# Altium PCB PCB1.PcbDoc
Units mm, origin at the board's own origin, x right, y up, seen from the top; angles counter-clockwise.
Board outline 39.5 x 32 mm, 4 copper layers (L1(Signal), L2(GND), L3(GND), L4(Signal)), stack 1.57 mm thick; 35 components, 29 nets, 170 pads, 61 vias.
Unrouted connection lines stored in the file: 21.
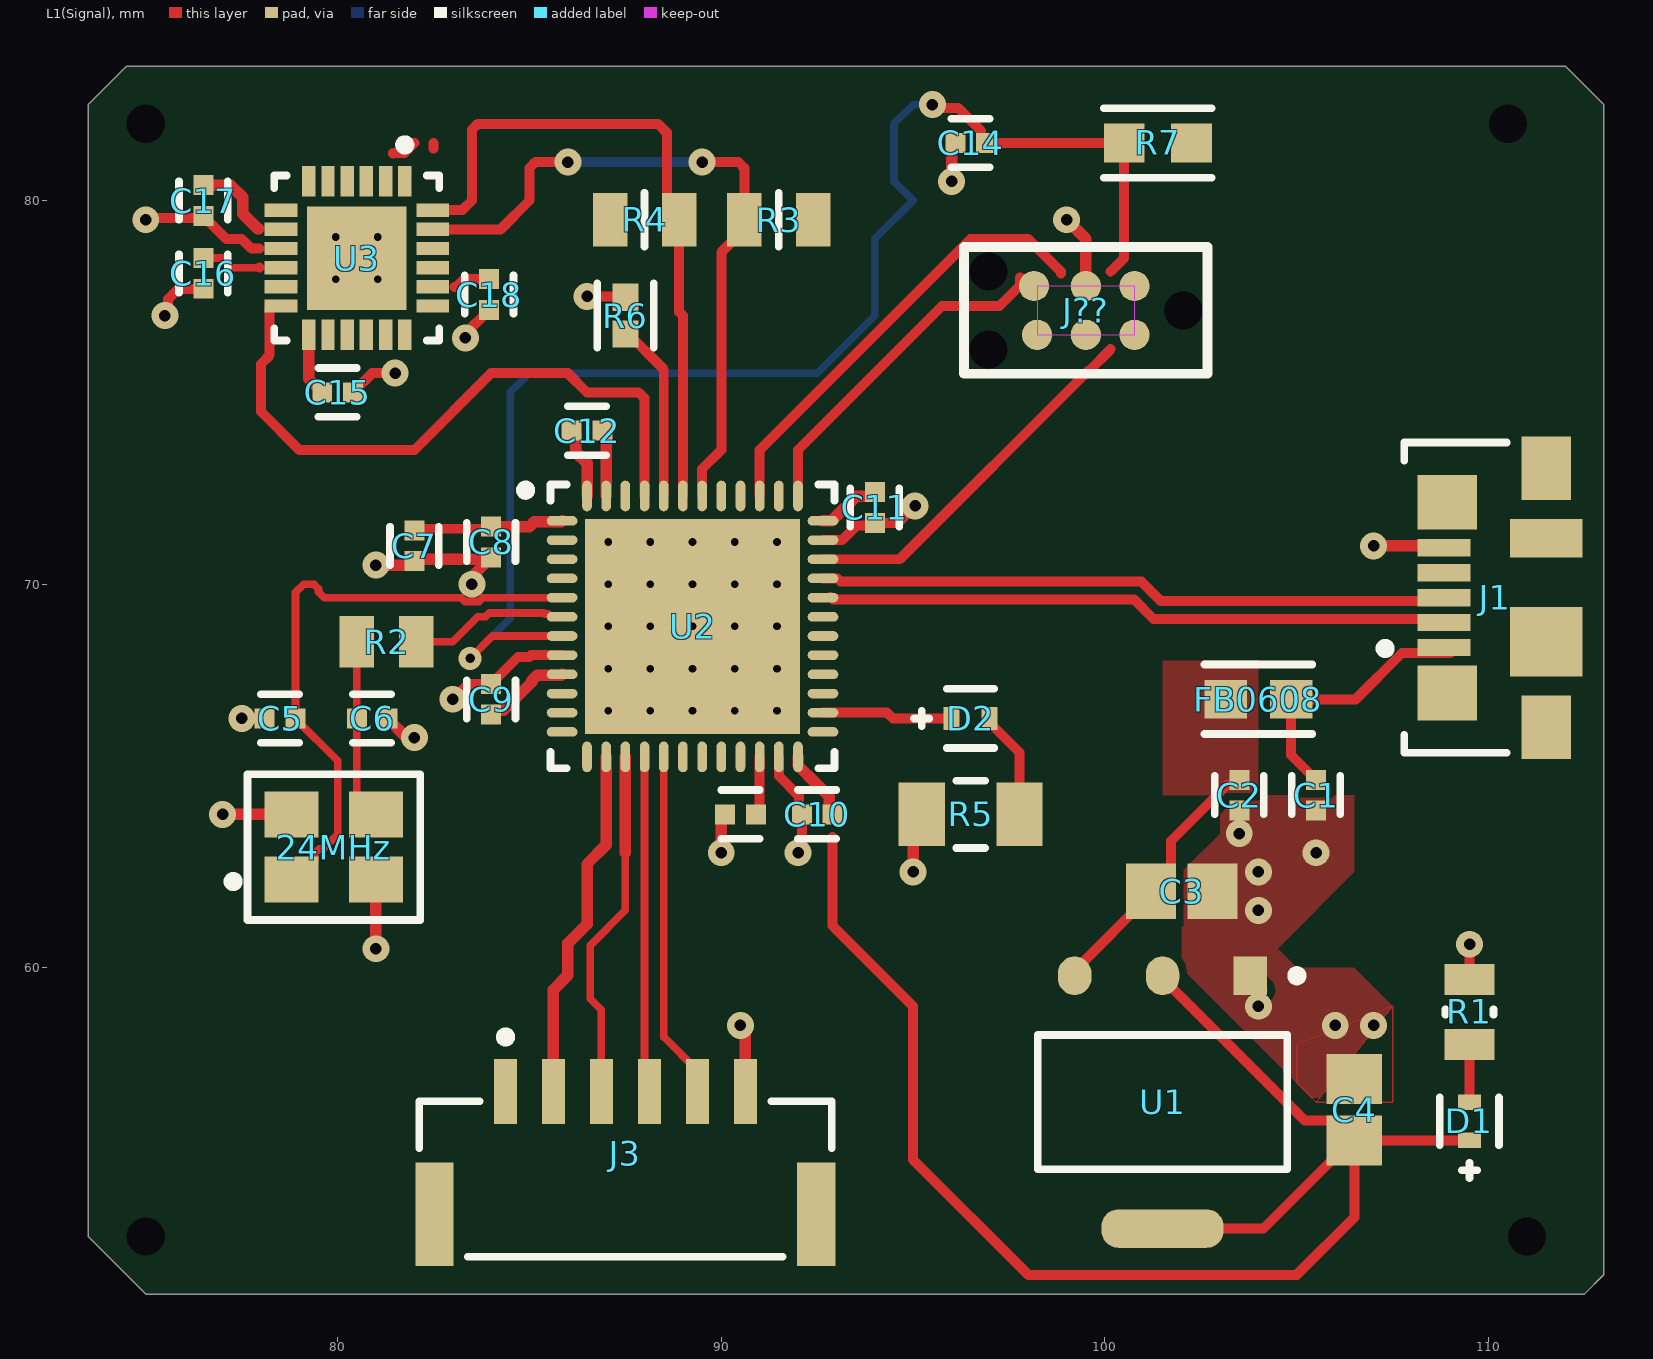
[diagram p0: L1(Signal) view]
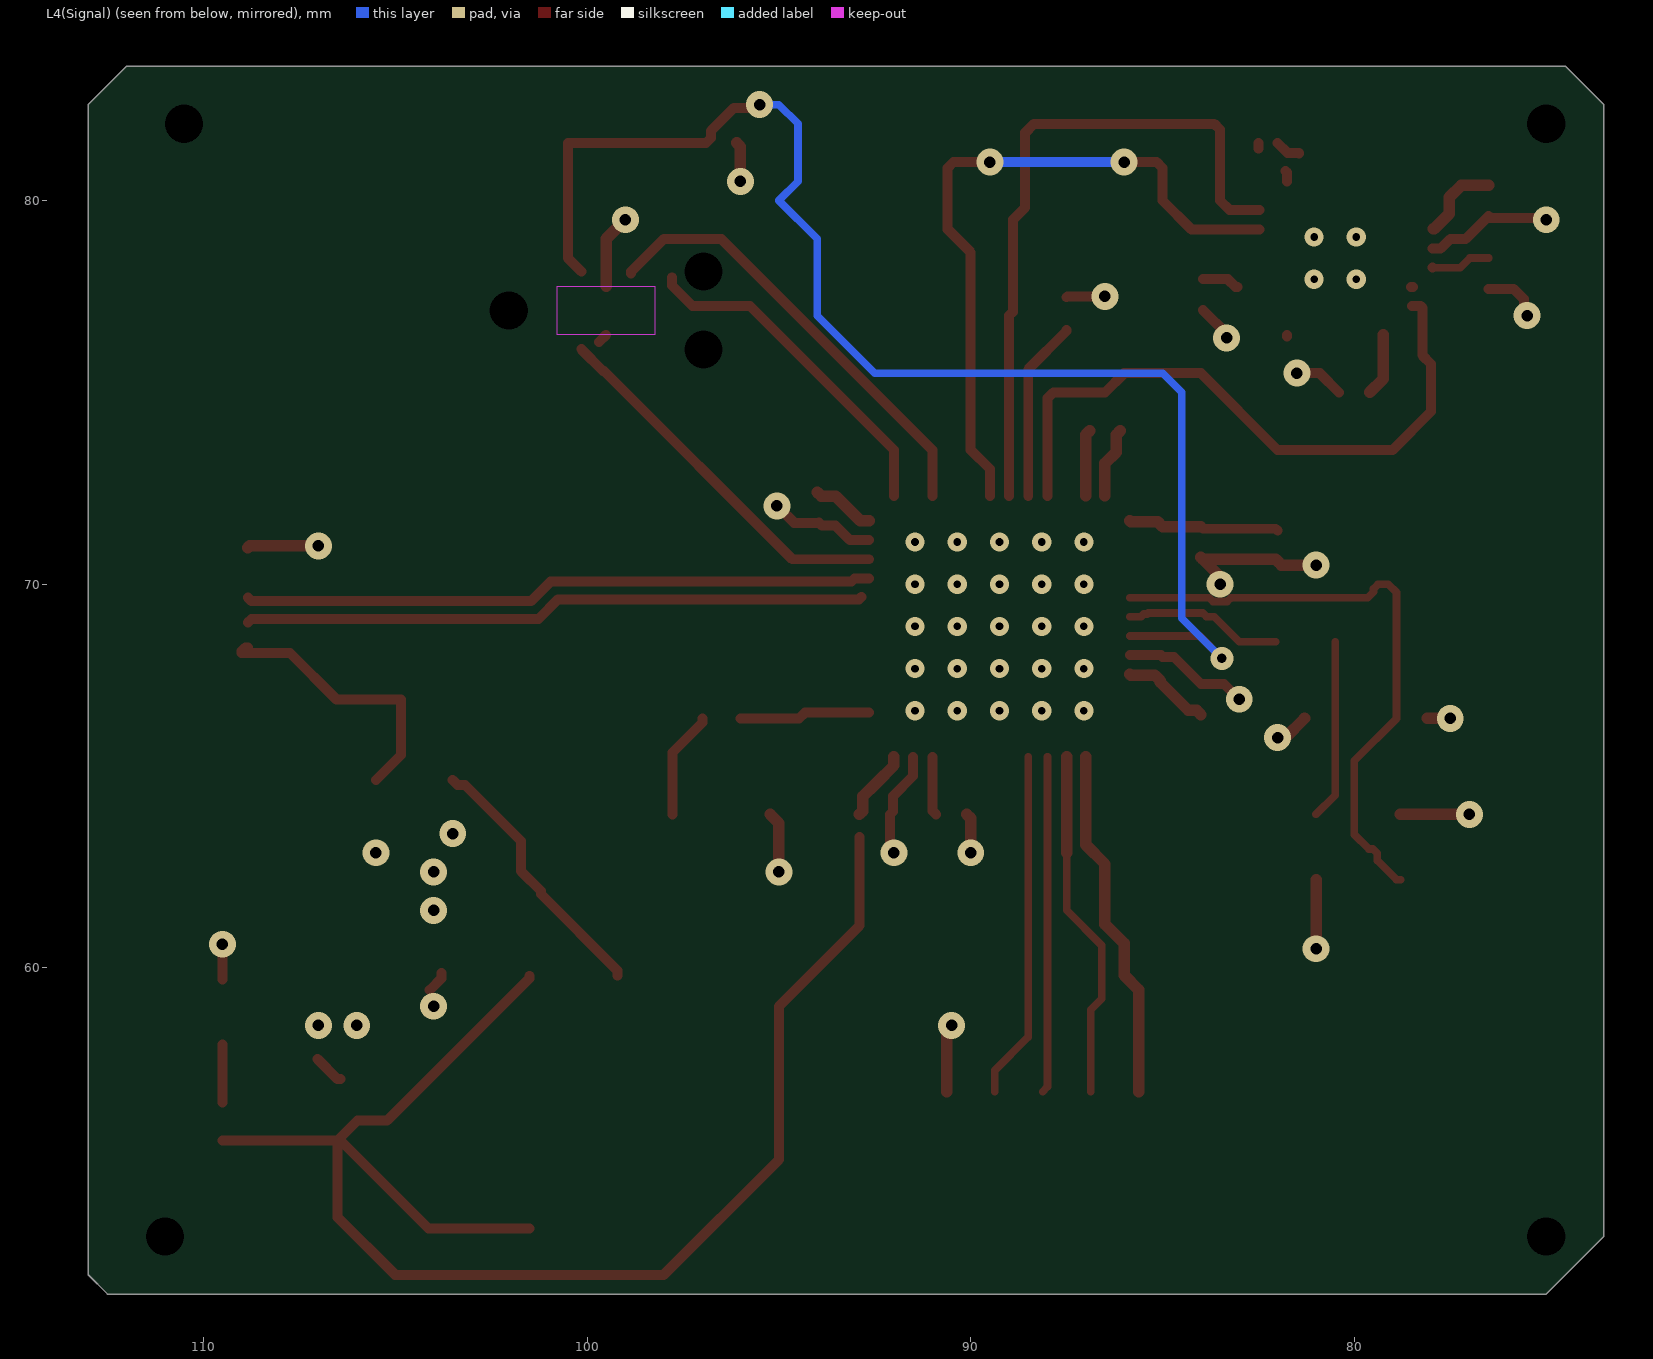
[diagram p1: L4(Signal) view, seen from below]
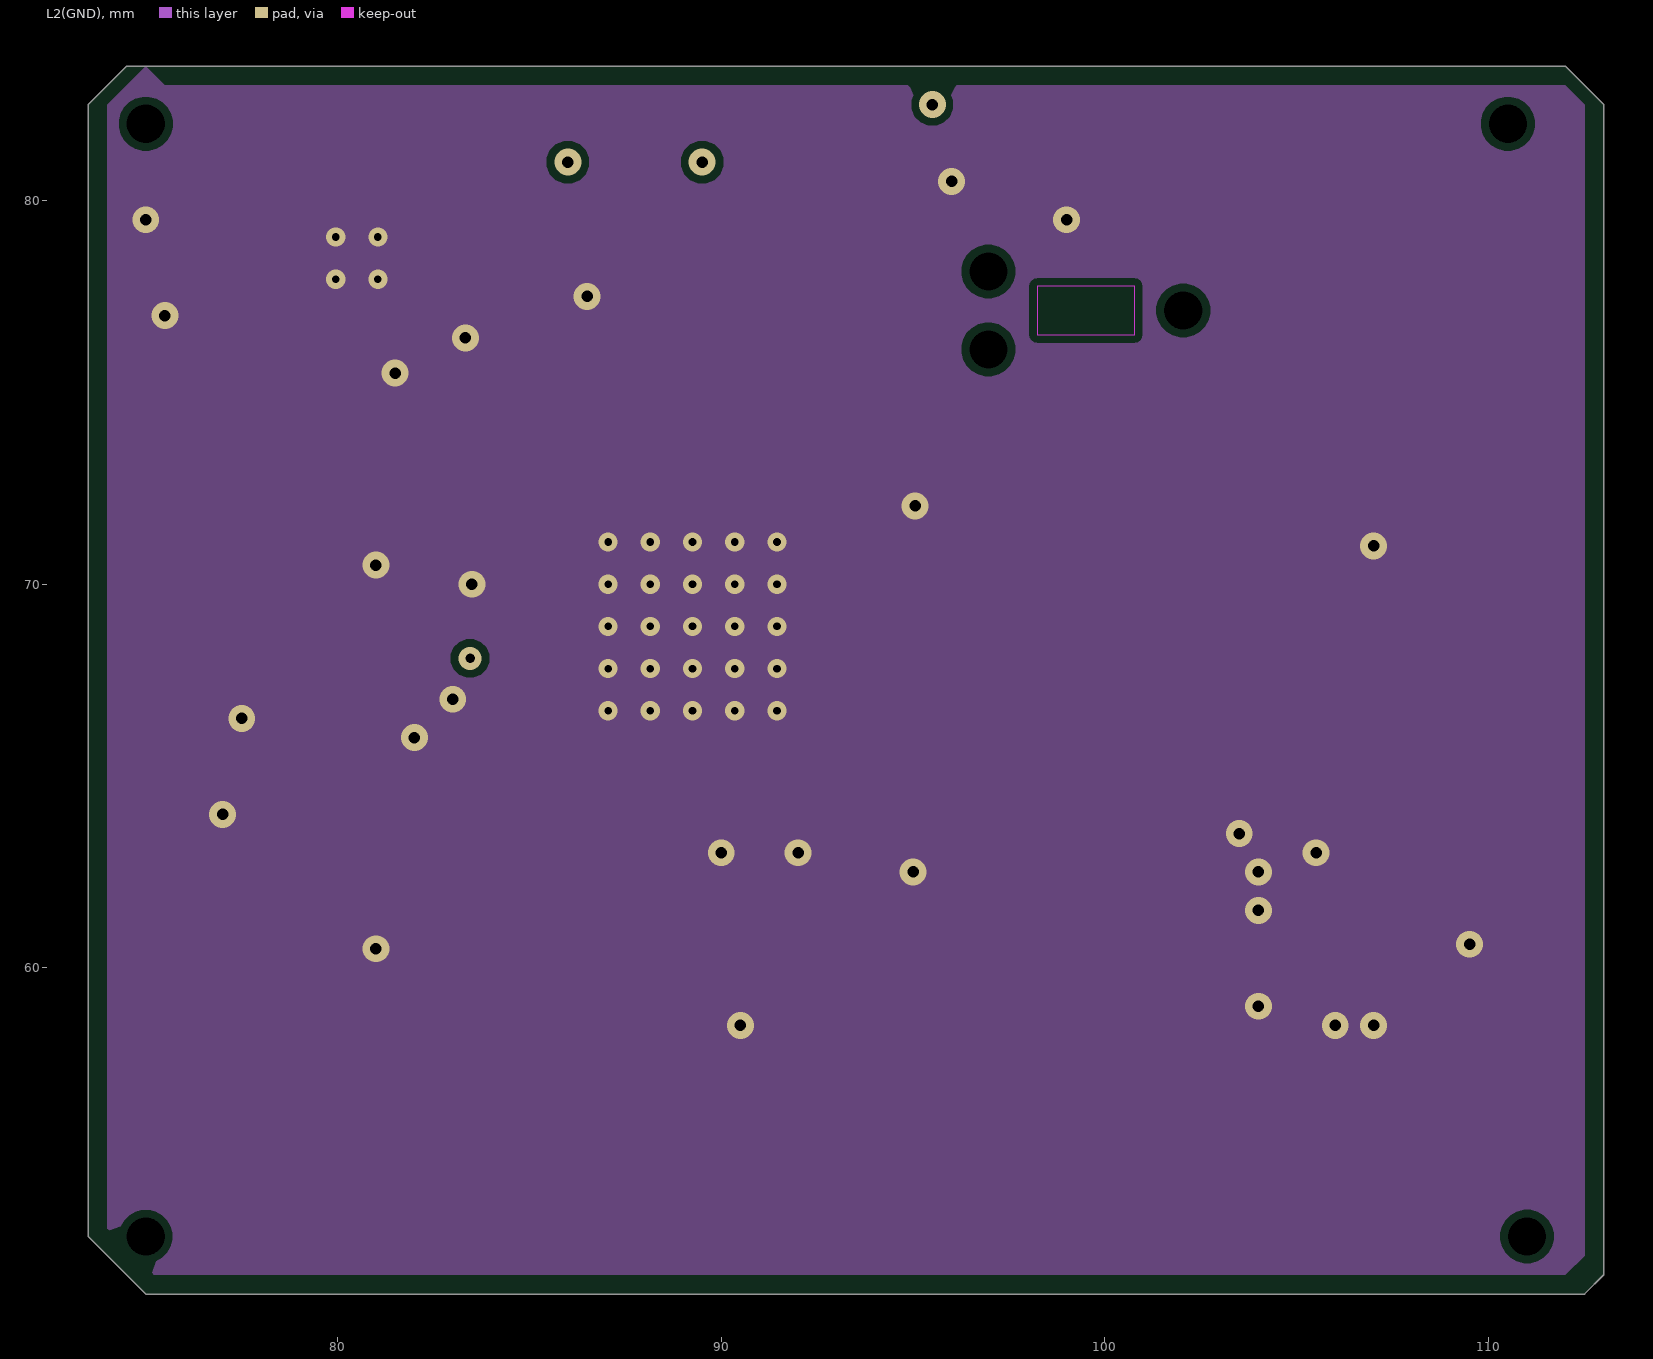
[diagram p2: L2(GND)]
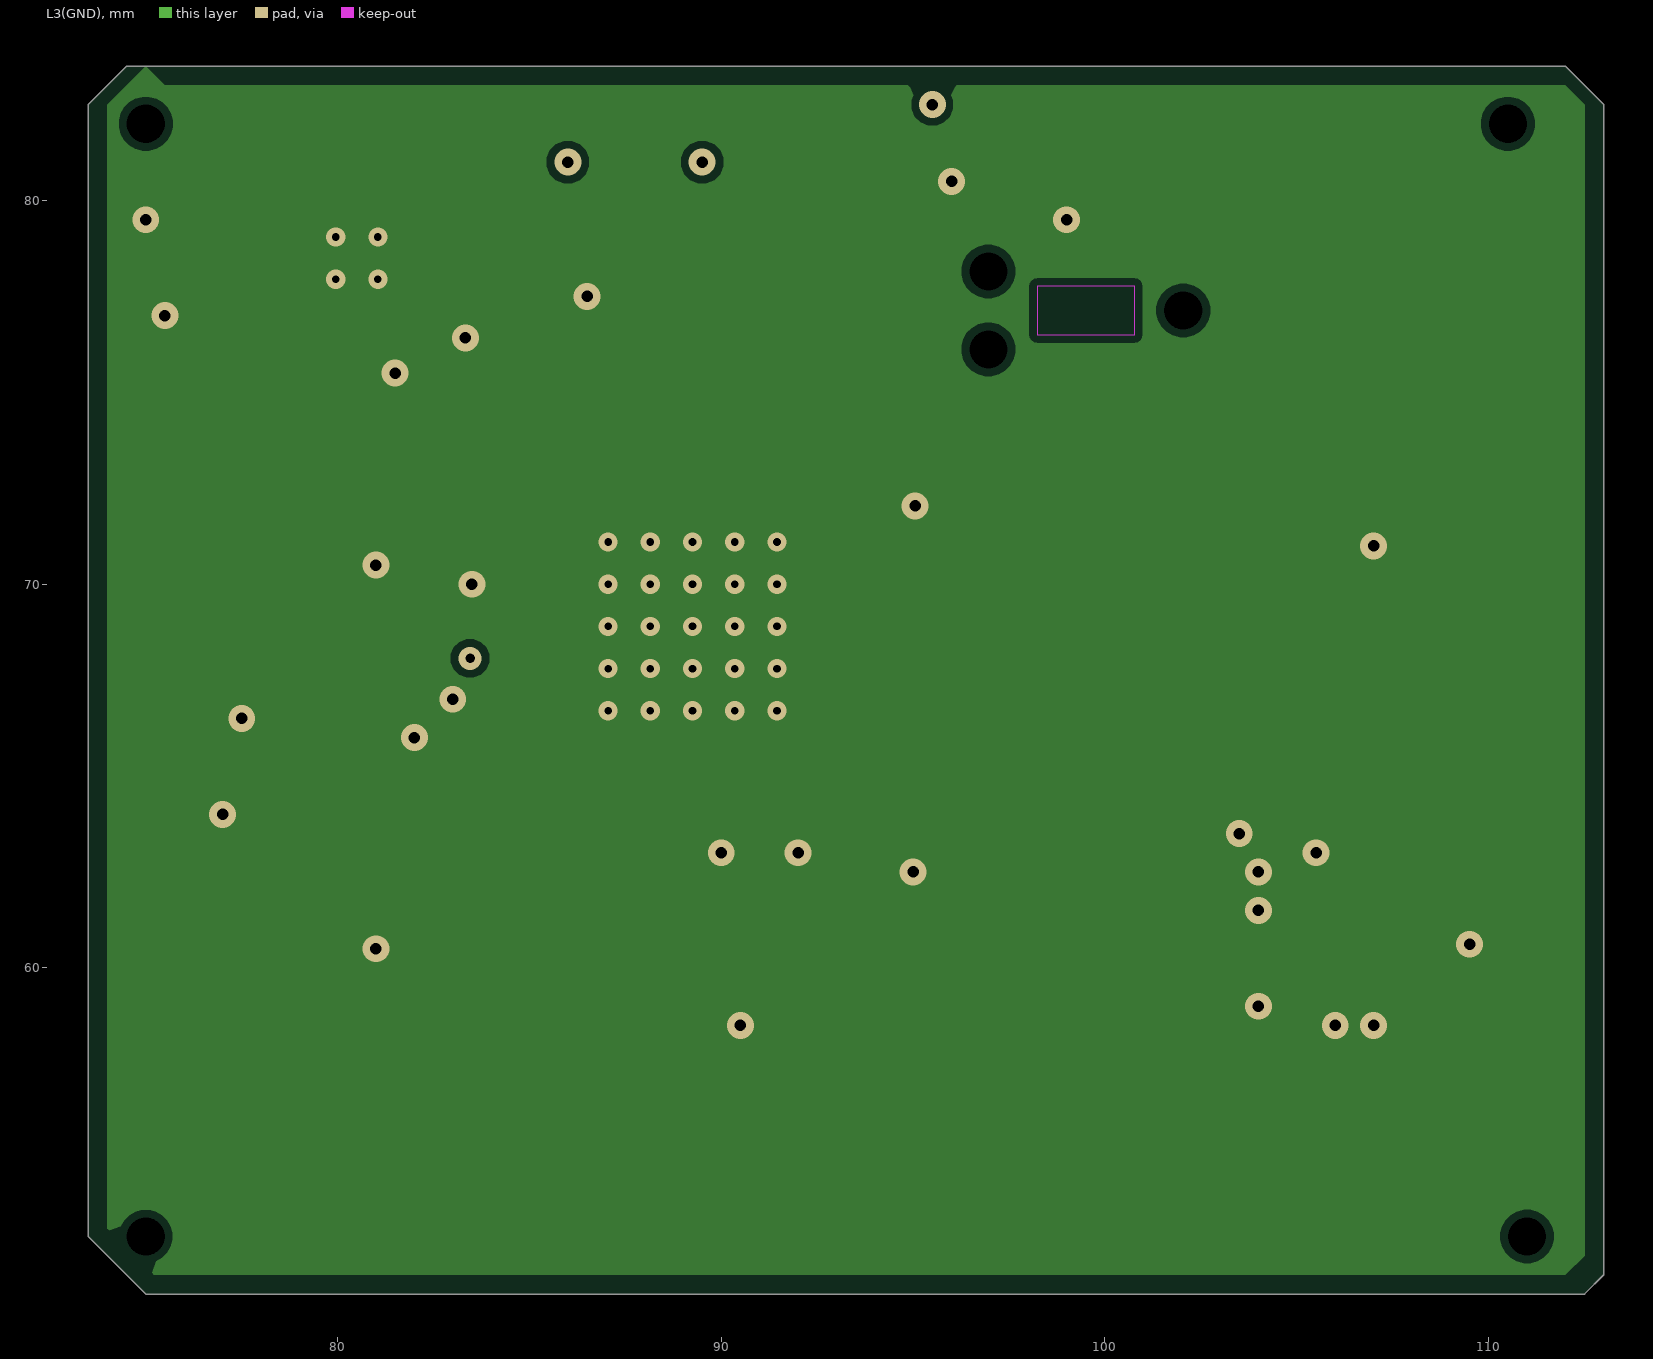
[diagram p3: L3(GND)]
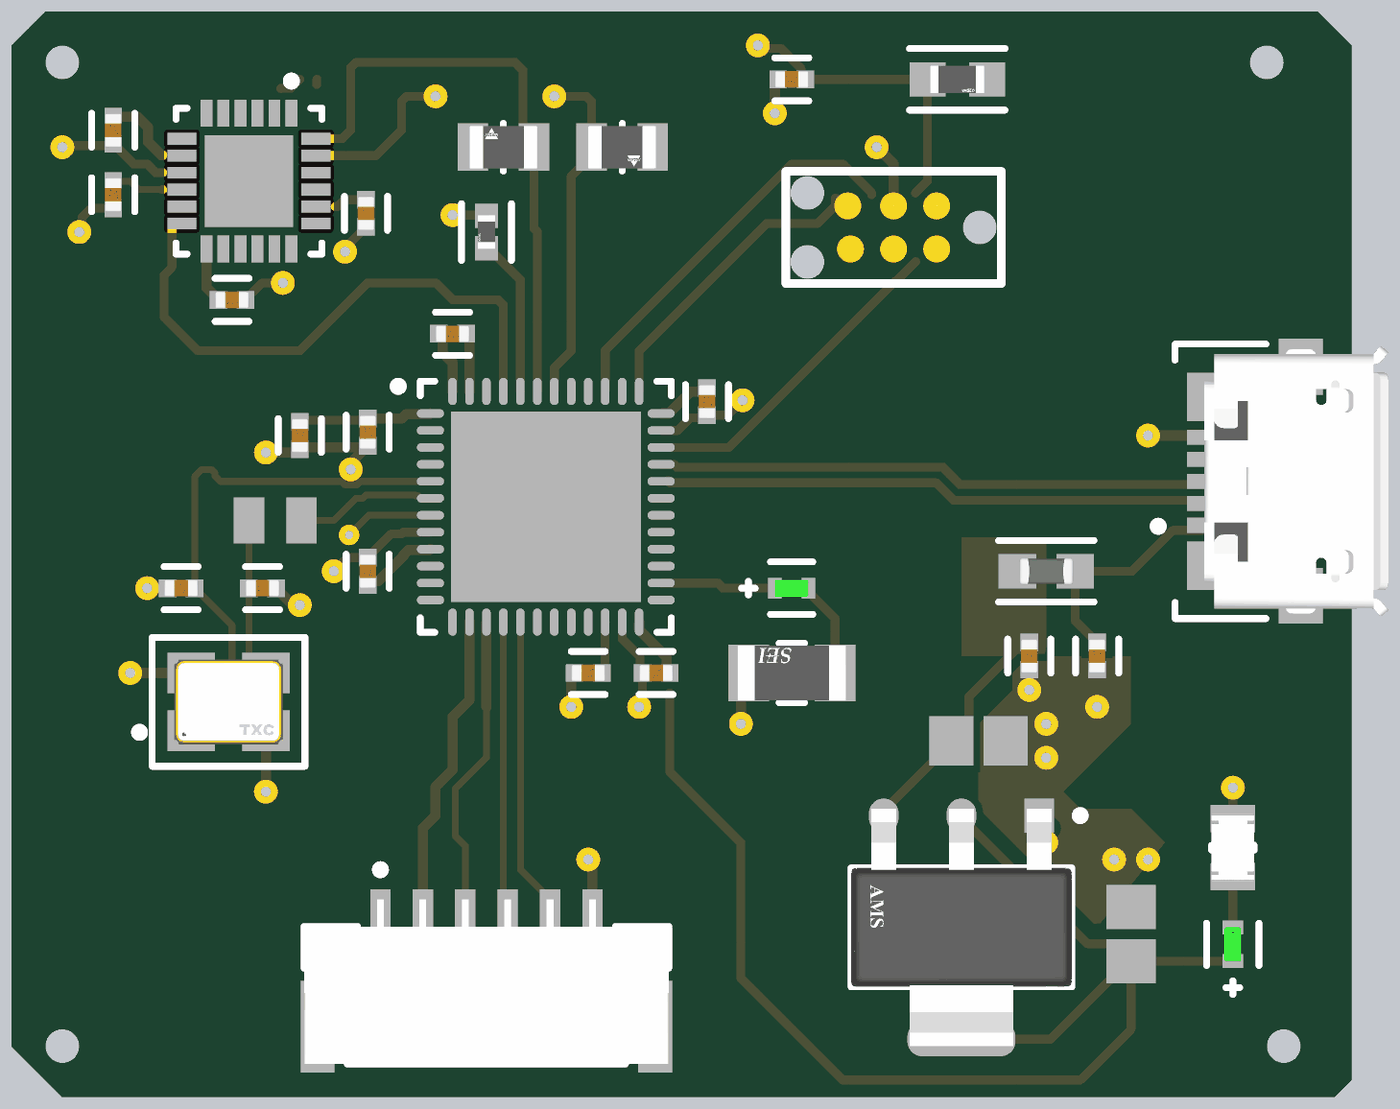
[diagram p4: 3D render of the assembled board from above, using the file's embedded part models]

## Layer stack, top to bottom
Top Solder: solder mask 0.0254, SM-001, Dk 4
L1(Signal): signal copper 0.035
Dielectric 1: prepreg 0.2, PP-017, Dk 4.6
L2(GND): signal copper 0.0175
Dielectric 3: core 1.065, Core-039, Dk 4.6
L3(GND): signal copper 0.0175
Dielectric 5: prepreg 0.2, PP-017, Dk 4.6
L4(Signal): signal copper 0.035
Bottom Solder: solder mask 0.0254, SM-001, Dk 4

## Board outline
73.5,53 73.5,82.5 74.5,83.5 112,83.5 113,82.5 113,52 112.5,51.5 75,51.5

## Design rules (kind name [scope] priority, off if disabled: settings)
Clearance [All] p1: gap=0.2 ignorepadtopadclearanceinfootprint=FALSE
DiffPairsRouting [All] p1: maxlimit=0.254 minlimit=0.203 mostfreqgap=0.254 toplayer_maxgap=0.203 toplayer_prefgap=0.203 toplayer_minwidth=0.26 toplayer_maxwidth=0.26 toplayer_prefwidth=0.26 bottomlayer_maxgap=0.203 bottomlayer_prefgap=0.203 bottomlayer_minwidth=0.26 bottomlayer_maxwidth=0.26 bottomlayer_prefwidth=0.26 impedanceprofiledriven=TRUE impedanceprofileid={04D04388-7D09-4078-8D84-CEB31DD55E11} impedanceprofilevalue=90.000000 maxuncoupledlength=12.7
PolygonConnect [All] p1: connectstyle=Direct reliefconductorwidth=0.254 reliefentries=4 polygonreliefangle="90 Angle" airgapwidth=0.254
RoutingVias [All] p1: holewidth=0.3 width=0.7 viastyle="Through Hole" minholewidth=0.25 minwidth=0.55 maxholewidth=0.4 maxwidth=0.9
SolderMaskExpansion [All] p1: expansion=0 istentingtop=FALSE
SupplyNets "Schematic Supply Nets_4" [InNet('3V3')] p1: voltage=0.000
SupplyNets "Schematic Supply Nets_3" [InNet('GND')] p2: voltage=0.000
SupplyNets "Schematic Supply Nets_2" [InNet('+5V')] p3: voltage=0.000
SupplyNets "Schematic Supply Nets_1" [InNet('+3V3')] p4: voltage=0.000
SupplyNets "Schematic Supply Nets" [InNet('VBUS')] p5: voltage=0.000
UnRoutedNet [All] p1: checkbadconnections=TRUE
Width [All] p1: maxlimit=1 minlimit=0.2 preferedwidth=0.3 midlayer1_minwidth=0.254 midlayer1_maxwidth=0.254 midlayer1_prefwidth=0.254 midlayer2_minwidth=0.254 midlayer2_maxwidth=0.254 midlayer2_prefwidth=0.254 minimp=50.000000 maximp=50.000000 favimp=50.000000
28 further rules are at their usual default settings.

## Classes and differential pairs
differential pair class DIFF_USB: USB_D
differential pair USB_D: +USB_D_P -USB_D_N

## Components (designator, comment, footprint, x,y, rotation, side; value= is the part's Value field where it differs from the comment)
24MHz "7M-24.000MEEQ-T" FP-7M-MFG 79.9,63.15 r0 top
C1 "2.2 uF" FP-C0402-BB-MFG 105.5,64.5 r90 top
C2 "2.2 uF" FP-C0402-BB-MFG 103.5,64.5 r90 top
C3 "22u" CAPC2013X140X50NL20T25 102,62 r180 top
C4 "2u2" CAPC2013X140X50NL20T25 106.5,56.3 r270 top
C5 "100 nF" FP-C0402-BB-MFG 78.5,66.5 r0 top
C6 "100 nF" FP-C0402-BB-MFG 80.9,66.5 r180 top
C7 "2.2 uF" FP-C0402-BB-MFG 82,71 r90 top
C8 "100 nF" FP-C0402-BB-MFG 84,71.1 r90 top
C9 "100 nF" FP-C0402-BB-MFG 84,67 r270 top
C10 "100 nF" FP-C0402-BB-MFG 92.5,64 r0 top
C11 "100 nF" FP-C0402-BB-MFG 94,72 r90 top
C12 "100 nF" FP-C0402-BB-MFG 86.5,74 r180 top
C14 "100 nF" FP-C0402-BB-MFG 96.5,81.5 r0 top
C15 "100 nF" FP-C0402-BB-MFG 80,75 r180 top
C16 "100 nF" FP-C0402-BB-MFG 76.5,78.1 r90 top
C17 "10nF" FP-C0402-BB-MFG 76.5,80 r90 top value="100 nF"
C18 "2n2" FP-C0402-BB-MFG 83.95,77.55 r90 top value="100 nF"
D1 "SM0402GC" FP-SM0402GC-MFG 109.5,56 r90 top
D2 "SM0402GC" FP-SM0402GC-MFG 96.495,66.5 r0 top
FB0608 "FBMH1608HM101-TV" FP-FBMH1608-IPC_A 104,67 r180 top
J1 "473460001" FP-473460001-MFG 111.15,69.65 r90 top
J3 "SM06B-GHS-TB(LF)(SN)" FP-SM06B-GHS-TB_LF_SN-MFG 87.5,54.5 r0 top
J?? "TC2030-MCP-NL" TC2030-IDC-NL 102.04,77.135 r180 top
R1 "CRCW0805330RJNEA" FP-CRCW0805-e3-IPC_C 109.5,58.851 r90 top
R2 "CRG0805ZR" RESC2013X65X40LL15T20 81.275,68.5 r0 top
R3 "MCU08050D2201BP500" FP-MCU0805-MFG 91.5,79.5 r0 top
R4 "MCU08050D2201BP500" FP-MCU0805-MFG 88,79.5 r180 top
R5 "RMCF1206FG1K00" FP-RMCF1206-IPC_C 96.5,64 r180 top
R6 "AC0402DR-0710K7L" FP-AC0402-IPC_A 87.5,77 r270 top
R7 "AC0603JR-7W10KL" FP-AC0603-IPC_A 101.377,81.5 r0 top
U1 "ams1117" FP-ams1117-IPC_C 101.5,56.5 r270 top
U2 "STM32F411CEU6" STM-UFQFPN48_L 89.25,68.9 r0 top
U3 "MPU-6050" IS-QFN-24_V 80.5,78.5 r270 top
? "C13" FP-C0402-BB-MFG 90.5,64 r0 top value="2.2 uF"

## Footprints (in the part's own frame and the unit in brackets; to place one, negate y for a bottom-side part, rotate by r counter-clockwise, add the part's x,y. Pads: shape width x height; smd on the part's side, far side on the other; paste and mask are expansions set on the pad)
CAPC2013X140X50NL20T25 [mm] "Chip Capacitor, 2-Leads, Body 2.00x1.25mm, IPC Medium Density"
  rect 1.3x1.45 smd: 1(-0.8,0) 2(0.8,0)
  body extent -1.1,-0.72 1.1,0.72, height 1.4
FP-7M-MFG [mm]
  rect 1.4x1.2 smd paste+0 mask+0: 1(-1.1,-0.85) 2(1.1,-0.85) 3(1.1,0.85) 4(-1.1,0.85)
  silkscreen extent -2.75,-1.9 2.25,1.9, body extent -1.9,-1.55 1.9,1.55, height 0.25
FP-473460001-MFG [mm]
  rect 0.45x1.38 smd paste+0 mask+0: 1(-1.3,2.31) 2(-0.65,2.31) 3(0,2.31) 4(0.65,2.31) 5(1.3,2.31)
  rect 1.425x1.55 smd paste+0 mask+0: 6(-2.488,2.225) 7(2.488,2.225)
  rect 1.65x1.3 smd paste+0 mask+0: 8(-3.375,-0.35) 11(3.375,-0.35)
  rect 1.8x1.9 smd paste+0 mask+0: 9(-1.15,-0.35)
  rect 1x1.9 smd paste+0 mask+0: 10(1.55,-0.35)
  silkscreen extent -4.05,0.67 4.05,3.97, body extent -4.3,-2.48 4.3,3.45, height 0.25
FP-AC0402-IPC_A [mm]
  rect 0.715x0.672 smd paste+0 mask+0: 1(-0.479,0) 2(0.479,0)
  silkscreen extent -0.84,-0.74 0.84,0.74, body extent -1.04,-0.54 1.04,0.54, height 0.25
FP-AC0603-IPC_A [mm]
  rect 1.059x1.012 smd paste+0 mask+0: 1(-0.877,0) 2(0.877,0)
  silkscreen extent -1.41,-0.91 1.41,0.91, body extent -1.91,-1.01 1.91,1.01, height 0.25
FP-ams1117-IPC_C [mm]
  rect 1.004x0.872 smd paste+0 mask+0: 1(-3.295,2.29)
  rrect100% 1.004x0.872 smd paste+0 mask+0: 2(-3.295,0) 3(-3.295,-2.29)
  rrect87% 1.004x3.182 smd paste+0 mask+0: 4(3.295,0)
  silkscreen extent -3.42,-3.25 1.75,3.63, body extent -3.9,-3.35 3.9,3.35, height 0.25
FP-C0402-BB-MFG [mm]
  rect 0.52x0.52 smd paste+0 mask+0: 1(-0.4,0) 2(0.4,0)
  silkscreen extent -0.5,-0.64 0.5,0.64, body extent -0.8,-0.4 0.8,0.4, height 0.25
FP-CRCW0805-e3-IPC_C [mil]
  rect 31.75x51.5 smd paste+0 mask+0: 1(-33.5,0) 2(33.5,0)
  silkscreen extent -3,-25 3,25, body extent -53,-31 53,31, height 10
FP-FBMH1608-IPC_A [mm]
  rect 1.109x1.012 smd paste+0 mask+0: 1(-0.852,0) 2(0.852,0)
  silkscreen extent -1.41,-0.91 1.41,0.91, body extent -1.91,-1.01 1.91,1.01, height 0.25
FP-MCU0805-MFG [mm]
  rect 0.9x1.4 smd paste+0 mask+0: 1(-0.9,0) 2(0.9,0)
  silkscreen extent 0,-0.7 0,0.7, body extent -1.45,-0.8 1.45,0.8, height 0.25
FP-RMCF1206-IPC_C [mm]
  rect 1.204x1.658 smd paste+0 mask+0: 1(-1.276,0) 2(1.276,0)
  silkscreen extent -0.37,-0.87 0.37,0.87, body extent -1.98,-0.97 1.98,0.97, height 0.25
FP-SM06B-GHS-TB_LF_SN-MFG [mm]
  rect 0.6x1.7 smd paste+0 mask+0: 1(-3.125,2.275) 2(-1.875,2.275) 3(-0.625,2.275) 4(0.625,2.275) 5(1.875,2.275) 6(3.125,2.275)
  rect 1x2.7 smd paste+0 mask+0: 7(-4.975,-0.925) 8(4.975,-0.925)
  silkscreen extent -5.38,-2.02 5.38,3.82, body extent -5.58,-2.37 5.58,3.22, height 0.25
FP-SM0402GC-MFG [mil]
  rect 16x24 smd paste+0 mask+0: 1(-19.5,0) 2(19.5,0)
  silkscreen extent -58,-30 25,31, body extent -31,-18 31,18, height 10
IS-QFN-24_V [mm] "QFN, 24-Leads, Body 4x4mm, Pitch 0.5mm, Thermal Pad 2.7x2.6mm"
  rect 0.8x0.35 smd: 1(-2,1.25) 2(-2,0.75) 3(-2,0.25) 4(-2,-0.25) 5(-2,-0.75) 6(-2,-1.25) 13(2,-1.25) 14(2,-0.75) 15(2,-0.25) 16(2,0.25) 17(2,0.75) 18(2,1.25)
  rect 0.35x0.85 smd mask+0.102: 7(-1.25,-1.975) 8(-0.75,-1.975) 9(-0.25,-1.975) 10(0.25,-1.975) 11(0.75,-1.975) 12(1.25,-1.975) 19(1.25,1.975) 20(0.75,1.975) 21(0.25,1.975) 22(-0.25,1.975) 23(-0.75,1.975) 24(-1.25,1.975)
  rect 2.7x2.6 smd: 25(0,0)
  silkscreen extent -3.07,-2.15 2.15,2.15, body extent -2,-2 2,2, height 0.95
RESC2013X65X40LL15T20 [mm] "Chip Resistor, 2-Leads, Body 2.00x1.30mm, IPC High Density"
  rect 0.9x1.35 smd: 1(-0.775,0) 2(0.775,0)
  body extent -1.07,-0.72 1.07,0.72, height 0.65
STM-UFQFPN48_L [mm] "QFN, 48-Leads, Body 7.1x7.1mm, Pitch 0.5mm, Thermal Pad 5.6x5.6mm, IPC High Density"
  oval 0.8x0.25 smd: 1(-3.4,2.75) 2(-3.4,2.25) 3(-3.4,1.75) 4(-3.4,1.25) 5(-3.4,0.75) 6(-3.4,0.25) 7(-3.4,-0.25) 8(-3.4,-0.75) 9(-3.4,-1.25) 10(-3.4,-1.75) 11(-3.4,-2.25) 12(-3.4,-2.75) 25(3.4,-2.75) 26(3.4,-2.25) 27(3.4,-1.75) 28(3.4,-1.25) 29(3.4,-0.75) 30(3.4,-0.25) 31(3.4,0.25) 32(3.4,0.75) 33(3.4,1.25) 34(3.4,1.75) 35(3.4,2.25) 36(3.4,2.75)
  oval 0.25x0.8 smd: 13(-2.75,-3.4) 14(-2.25,-3.4) 15(-1.75,-3.4) 16(-1.25,-3.4) 17(-0.75,-3.4) 18(-0.25,-3.4) 19(0.25,-3.4) 20(0.75,-3.4) 21(1.25,-3.4) 22(1.75,-3.4) 23(2.25,-3.4) 24(2.75,-3.4) 37(2.75,3.4) 38(2.25,3.4) 39(1.75,3.4) 40(1.25,3.4) 41(0.75,3.4) 42(0.25,3.4) 43(-0.25,3.4) 44(-0.75,3.4) 45(-1.25,3.4) 46(-1.75,3.4) 47(-2.25,3.4) 48(-2.75,3.4)
  rect 5.6x5.6 smd: 49(0,0)
  silkscreen extent -4.47,-3.7 3.7,3.7, body extent -3.55,-3.55 3.55,3.55, height 0.6
TC2030-IDC-NL [mm] "Tag-Connect 6-Pin with No Legs (PN# TC2030-IDC-NL)"
  round 0.9 hole 0.995 unplated: 0(0,0) 0(5.08,-1.016) 0(5.08,1.016)
  round 0.79 smd paste-0.39: 1(1.27,-0.635) 2(1.27,0.635) 3(2.54,-0.635) 4(2.54,0.635) 5(3.89,-0.635) 6(3.81,0.635)
  Keep-Out Layer region: 1.27,-0.635 3.81,-0.635 3.81,0.635 1.27,0.635
  silkscreen extent -0.64,-1.65 5.71,1.65

## Part data
24MHz: library part CMP-18717-000318-1, "Crystal 24MHz, 10ppm, 10pF, 50Ω", Case/Package=SMD/SMT, ESR (Equivalent Series Resistance)=60R, Frequency=24MHz, Frequency Stability=10ppm, Load Capacitance=10pF, Max Operating Temperature=70°C, Min Operating Temperature=-20°C, Package Quantity=3000, Depth=2.5mm, Frequency Tolerance=10ppm, Height=0.031inch, Lead Free="Lead Free", Length=3.2mm, Mount="Surface Mount", Number of Pins=4, Packaging="Tape and Reel", REACH SVHC="No SVHC", Series=7M, Termination=SMD/SMT, Tolerance=10ppm, Width=0.098inch
C1 C2 C5 C6 C7 C8 C9 C10 C11 C12 C14 C15 C16: library part CMP-1034-01425-3, "Capacitor, Ceramic, 330Pf, 16Vdc, 10-% Tol, 10+% Tol, X7r-Tc Code, -15, 15%-Tc Rohs Compliant: Yes", Manufacturer=Kemet, Manufacturer Part Number=C0402C331K4RACTU, Package=C0402-BB, Temperature="-55°C to +125°C", Temperature Characteristic=X7R, Temperature Coefficient=15%, Temperature Range High=+125°C, Temperature Range Low=-55°C, Tolerance=0.1, Voltage Rating="16 V", Automotive=No, Category=Cap, ComponentLink2Description=Datasheet, ComponentLink2URL=https://content.kemet.com/datasheets/KEM_C1002_X7R_SMD.pdf, Device Class L1="Passive Components", Device Class L2=Capacitors, Device Class L3="Ceramic Capacitors", Digikey Description="Capacitor, Ceramic, 330Pf, 16Vdc, 10-% Tol, 10+% Tol, X7r-Tc Code, -15, 15%-Tc Rohs Compliant: Yes", Height=0.55mm, Ipc Land Pattern Name=CAPC10050X50, Lead Free=Yes, Material=Ceramic, Mouser Description="Multilayer Ceramic Capacitors MLCC - SMD/SMT 16volts 330pF X7R 10%", Octopart=https://octopart.com/c0402c331k4ractu-kemet-9139363, RoHS=TRUE
  C1 C2 C7: Capacitance="2.2 uF"
  C5 C6 C8 C9 C10 C11 C12 C14 C15 C16: Capacitance="100 nF"
C3 C4: library part CMP-2007-03253-1, Manufacturer=Kemet, Part Number=C0805C185K4RACTU
C17 C18: library part CMP-1034-01425-3, "Capacitor, Ceramic, 330Pf, 16Vdc, 10-% Tol, 10+% Tol, X7r-Tc Code, -15, 15%-Tc Rohs Compliant: Yes", Capacitance="100 nF", Manufacturer=Kemet, Manufacturer Part Number=C0402C331K4RACTU, Package=C0402-BB, Temperature="-55°C to +125°C", Temperature Characteristic=X7R, Temperature Coefficient=15%, Temperature Range High=+125°C, Temperature Range Low=-55°C, Tolerance=0.1, Voltage Rating="16 V", Automotive=No, Category=Cap, ComponentLink2Description=Datasheet, ComponentLink2URL=https://content.kemet.com/datasheets/KEM_C1002_X7R_SMD.pdf, Device Class L1="Passive Components", Device Class L2=Capacitors, Device Class L3="Ceramic Capacitors", Digikey Description="Capacitor, Ceramic, 330Pf, 16Vdc, 10-% Tol, 10+% Tol, X7r-Tc Code, -15, 15%-Tc Rohs Compliant: Yes", Height=0.55mm, Ipc Land Pattern Name=CAPC10050X50, Lead Free=Yes, Material=Ceramic, Mouser Description="Multilayer Ceramic Capacitors MLCC - SMD/SMT 16volts 330pF X7R 10%", Octopart=https://octopart.com/c0402c331k4ractu-kemet-9139363, RoHS=TRUE
D1 D2: library part CMP-35283-000001-2, "LED GREEN CLEAR 0402 SMD", Case Code (Imperial)=0402, Case Code (Metric)=1005, Color=Green, Forward Voltage=1.9V, Lens Color=Colorless, Test Current=20mA, Case/Package=0402, Dominant Wavelength=572nm, Height=0.71mm, Length=1mm, Lens Size=1mm, Lens Style=Flat, Lens Transparency=Clear, Luminous Intensity=28.5mcd, Mount="Surface Mount", Packaging="Tape and Reel", Viewing Angle=130°, Width=0.5mm
FB0608: library part CMP-14488-000006-2, "None", Case Code (Imperial)=0603, Case Code (Metric)=1608, DC Resistance (DCR)=35mR, Max Current Rating=2.5A, Max DC Current=2A, Max Operating Temperature=125°C, Min Operating Temperature=-40°C, Package Quantity=4000, Ratings=AEC-Q200, Test Frequency=100MHz, Tolerance=25%, Case/Package=0603, Core Material=Ferrite, Height=0.8mm, Impedance=100R, Length=0.063inch, Mount="Surface Mount", Number of Lines=1, Packaging="Tape and Reel", RoHS Compliant=Yes, Termination=SMD/SMT, Weight=7.1E-05oz, Width=0.031inch
J1: library part CMP-2000-05246-2, "CONN RCPT USB2.0 MICRO B SMD R/A", Current Rating=1.8A, Manufacturer=Molex, Package=0, Temperature="-30°C to +85°C", Temperature Range High=+85°C, Temperature Range Low=-30°C, Voltage Rating=30V, Automotive=No, Category=Conn, ComponentLink2Description=Datasheet, ComponentLink2URL=https://www.molex.com/webdocs/datasheets/pdf/en-us/0473460001_IO_CONNECTORS.pdf, Conn Orientation="Right Angle", Contact Material=Gold,Nickel, Device Class L1=Connectors, Device Class L2="USB Connectors", Device Class L3=unset, Digikey Description="CONN RCPT USB2.0 MICRO B SMD R/A", Footprint Url=https://www.molex.com/pdm_docs/sd/473460001_sd.pdf, Height=2.945mm, Is Female=yes, Lead Free=Yes, Manufacturer Part Number=473460001, Number Of Contacts=5, Octopart=https://octopart.com/47346-0001-molex-7164928, Pitch=0.65mm, RoHS=TRUE, Shielding=true, Usb Standard="USB 2.0"
J3: library part CMP-17439-000061-1, "CONN HEADER SMD R/A 6POS 1.25MM", Color=Natural, Contact Resistance=50mR, Current Rating=1A, Housing Color=Beige, Max Operating Temperature=85°C, Max Voltage Rating (AC)=50V, Min Operating Temperature=-25°C, Connector Type="Outer Shroud Contact", Contact Material=Bronze, Contact Plating=Tin, Depth=4.05mm, Fastening Type=Ramp, Housing Material=Polyamide, Lead Free="Lead Free", Length=10.75mm, Max Current Rating=1A, Mount="Surface Mount", Number Of Contacts=6, Number of Positions=6, Number of Rows=1, Orientation="Right Angle", Packaging="Tape and Reel", Pitch=1.25mm, Termination=Solder, Voltage Rating=50V
J??: library part CMP-205963-000002-1, "CABLE TAG-CONNECT IN-CIRCUIT", Package Quantity=1, Lead Free="Lead Free", Reach SVHC Compliant=Yes, RoHS Compliant=Yes, Series=-
R1: library part CMP-2001-03824-2, "RES Thick Film, 330Ω, 5%, 0.125W, 200ppm/°C, 0805", Case Code (Imperial)=0805, Case Code (Metric)=2012, Max Operating Temperature=155°C, Max Power Dissipation=125mW, Min Operating Temperature=-55°C, Package Quantity=1, Resistance=330R, Temperature Coefficient=200ppm/°C, Tolerance=5%, Voltage Rating=150V, Case/Package=0805, Composition="Thick Film", Contact Plating=Tin, Depth=1.25mm, Features="Automotive AEC-Q200", Height=0.02inch, Lead Free="Lead Free", Length=2mm, Military Standard=Not, Number of Terminations=2, Packaging="Tape and Reel", Power Rating=125mW, Radiation Hardening=No, Termination=SMD/SMT, Voltage Rating (DC)=150V, Weight=0.000194oz, Width=0.049inch
R2: library part CMP-2000-07514-1, "Chip Resistor, 0 Ohm, 0.125 W, -55 to 125 degC, 0805 (2012 Metric), RoHS, Tape and Reel", Case Code (Imperial)=0805, Case Code (Metric)=2012, Manufacturer="TE Connectivity", Max Operating Temperature=125degC, Min Operating Temperature=-55degC, Number of Resistors=1, Package Description="2-Pin Surface Mount Device, Body 2 x 1.25 mm", Package Quantity=5000, Package Reference=RESC2013X65X40L15T20, Power Rating=125mW, Resistance=0mOhm, Tolerance=0%, Voltage Rating=150V, Case\/Package=0805, Composition=ThickFilm, Datasheet URL=www.te.com/commerce/DocumentDelivery/DDEController?Action=showdoc&DocId=Customer+Drawing%7F1623401%7FBA%7Fpdf%7FEnglish%7FENG_CD_1623401_BA.pdf%7F1623401-1, Datasheet Version="Rev. BA, 12/2009", Depth=1.25mm, ELV=Compliant, Height=0.55mm, Length=2mm, Manufacturer URL=http://www.te.com/, Mount=SurfaceMount, Mounting Technology=SurfaceMount, Number of Terminations=2, Packaging=TapeandReel, Radiation Hardening=No, RoHSCompliant=true, Termination=Solder, Weight=0.000194oz, Width=1.25mm
R3 R4: library part CMP-02407-001865-1, "RES 1.05K OHM 0.5% 1/5W 0805", Case/Package=0805, Max Operating Temperature=125°C, Max Power Dissipation=125mW, Min Operating Temperature=-55°C, Package Quantity=5000, Resistance=2.2kR, Temperature Coefficient=25ppm/°C, Tolerance=0.1%, Composition="Thin Film", Depth=1.25mm, Height=0.022inch, Lead Free="Lead Free", Length=0.079inch, Military Standard=Not, Number of Terminations=2, Packaging="Tape and Reel", Width=0.049inch
R5: library part CMP-26527-005571-1, "1kΩ ±1% 0.25W 1206 Thick Film Chip Resistor AEC-Q200 compliant", Case/Package=1206, Max Operating Temperature=155°C, Max Power Dissipation=250mW, Min Operating Temperature=-55°C, Package Quantity=10000, Resistance=1kR, Resistor Type="Thick Film", Temperature Coefficient=100ppm/°C, Tolerance=1%, Contact Plating=Tin, Features="Automotive AEC-Q200", Height=0.028inch, Length=0.126inch, Mount="Surface Mount", Number of Terminations=2, Packaging="Tape and Reel", Radiation Hardening=No, RoHS Compliant=Yes, Series=RMCF, Width=0.063inch
R6: library part CMP-03412-007717-2, "RES 10.7kΩ ±0.5% 0.063W 0402", RoHS Compliant=Yes
R7: library part CMP-03412-040683-1, "RES 10kΩ 5.00% 0.2W 0603"
U1: library part CMP-209535-000002-1, "1A LOW DROPOUT VOLTAGE REGULATOR", RoHS Compliant=Yes
U2: library part CMP-0243-00165-1, "ARM Cortex-M4 32-bit MCU+FPU, 512 KB Flash, 128 KB RAM, 36 I/Os, 48-Pin UFQFPN, -40 to 85 degC, Tray", I/Os (High Current)=36, Operating Frequency(F) (Processor speed) (MHz)=100, Package Description=UFQFPN48, Package Reference="48-Pin Ultra Thin Fine Pitch Quad Flat No-Lead, 7 x 7 x 0.6 mm Body, 0.5 mm Pitch, Exposed Pad", Supply Voltage(Vcc) min (V)=1.7, ComponentLink1Description="Manufacturer URL", ComponentLink1URL=http://www.st.com/, ComponentLink2Description=Datasheet, ComponentLink2URL=http://www.st.com/st-web-ui/static/active/en/resource/technical/document/datasheet/DM00115249.pdf, Core="ARM Cortex-M4", DatasheetVersion="Rev. 6", FLASH Size (Prog) (kB)=512, Internal RAM Size (kB)=128, Mounting Technology="Surface Mount", Packing=Tray
U3: library part CMP-1753-00002-2, "3-Axis Gyroscope, Accelerometer and a Digital Motion Processor(TM) (DMP), 2.375 to 3.46 V, -40 to 85 degC, 24-Pin QFN, RoHS, Tape and Reel", Manufacturer=InvenSense, Standard Package=5,000, Category=Sensors,Transducers, Datasheet URL=http://datasheet.octopart.com/MPU-6050-InvenSense-datasheet-14421344.pdf, Datasheet Version="Rev. 3.3, 05/2012", Dynamic Catalog=MPU-6000™Series, Family=Multifunction, Featured Product=MPU-60506-Axis,IntegratedI²CSolution, Manufacturer URL=http://www.invensense.com/, Online Catalog=MPU-6000™Series, Other Names="1428-1007-2 / MPU6050", Output Type=Digital, Sensor Type=MotionTracking, Unit PriceUSD=Digital
?: library part CMP-1034-01425-3, "Capacitor, Ceramic, 330Pf, 16Vdc, 10-% Tol, 10+% Tol, X7r-Tc Code, -15, 15%-Tc Rohs Compliant: Yes", Capacitance="2.2 uF", Manufacturer=Kemet, Manufacturer Part Number=C0402C331K4RACTU, Package=C0402-BB, Temperature="-55°C to +125°C", Temperature Characteristic=X7R, Temperature Coefficient=15%, Temperature Range High=+125°C, Temperature Range Low=-55°C, Tolerance=0.1, Voltage Rating="16 V", Automotive=No, Category=Cap, ComponentLink2Description=Datasheet, ComponentLink2URL=https://content.kemet.com/datasheets/KEM_C1002_X7R_SMD.pdf, Device Class L1="Passive Components", Device Class L2=Capacitors, Device Class L3="Ceramic Capacitors", Digikey Description="Capacitor, Ceramic, 330Pf, 16Vdc, 10-% Tol, 10+% Tol, X7r-Tc Code, -15, 15%-Tc Rohs Compliant: Yes", Height=0.55mm, Ipc Land Pattern Name=CAPC10050X50, Lead Free=Yes, Material=Ceramic, Mouser Description="Multilayer Ceramic Capacitors MLCC - SMD/SMT 16volts 330pF X7R 10%", Octopart=https://octopart.com/c0402c331k4ractu-kemet-9139363, RoHS=TRUE

## Free pads (board coordinates)
  round 0.9 hole 0.995 unplated: 1(75,53) 1(75,82) 1(110.5,82) 1(111,53)

## Via types
v1: diameter 0.7, hole 0.3, L1(Signal) to L4(Signal), 31 vias
v2: diameter 0.5, hole 0.2, L1(Signal) to L4(Signal), 29 vias
v3: diameter 0.6, hole 0.25, L1(Signal) to L4(Signal), 1 vias

## Nets (pads, with @x,y where several pads share a name; then routed paths per layer and width w, separated by ;. In a path a pad name is that pad's centre, name@x,y a point inside that pad or via, vN(x,y) a via of type N, cw(c..) or ccw(c..) an arc to the next point about the centre after c; other vN are vias at no path point)
3V3: C4.2 D1.1 U1.2 U1.4 | length 40.4
  L1(Signal) w0.26: 92.9,63.41 92.9,61.1 95,59 95,55 98,52 105,52 106.5,53.5 C4.2 ; U1.4 104.13,53.205 106.425,55.5 C4.2 ; U1.2 101.5,59.729 105.209,56.02 105.98,56.02 C4.2 ; D1.1 106.505,55.505 C4.2
+3V3: C7.2 C8.2 C9.2 C10.2 C11.2 C12.2 C15.2 C17.2 J3.1 J??.2 R3.2 R4.2 R7.2 U2.1 U2.9 U2.24 U2.36 U2.48 U3.8 U3.13 | length 15.5
  L1(Signal) w0.25: C7.2 82.05,71.45 83.95,71.45 C8.2
  L1(Signal) w0.3: C17.2 77.21,80.4 77.525,80.085 77.525,79.655 77.918,79.262 77.942,79.262 ; U3.13 79.25,75.35 C15.2 ; C9.2 84.11,66.71 84.325,66.71 85.056,67.441 85.056,67.482 85.199,67.625 85.825,67.625 U2.9 ; C8.2 85,71.5 85.125,71.625 85.825,71.625 U2.1 ; C12.2 86.21,73.89 86.21,73.44 86.5,73.15 U2.48 ; U2.24 92,65.275 92.449,64.826 92.631,64.644 92.636,64.644 92.811,64.468 92.811,64.089 C10.2 ; U2.36 92.875,71.65 93.515,72.29 93.89,72.29 C11.2
+5V: C2.2 C3.2 FB0608.2 U1.3 | length 7
  L1(Signal) w0.26: U1.3 99.21,59.935 101.2,61.925 C3.2 101.72,62.52 101.72,63.307 103.183,64.77 103.37,64.77 C2.2
GND: 24MHz.2 24MHz.4 ?.1 C1.1 C2.1 C3.1 C4.1 C5.1 C6.1 C7.1 C8.1 C9.1 C10.1 C11.1 C12.1 C14.1 C15.1 C16.1 C17.1 C18.1 J1.5 J3.6 J??.3 R1.2 R5.2 R6.1 U1.1 U2.8 U2.23 U2.35 U2.47 U2.49 U3.1 U3.9 U3.11 U3.18 U3.25 | length 39.6
  L1(Signal) w0.26: v1(75,79.5) 75.05,79.55 76.45,79.55 C17.1 77.1,79 77.5,79 77.75,78.75 77.958,78.75 ; v1(75.5,77) 75.584,77.084 75.584,77.434 75.85,77.7 C16.1 ; U3.11@78.478,77.75 U3.11 ; C15.1 80.9,75.5 v1(81.5,75.5) ; U3.18@81.75,76.453 U3.18 ; U3.1 81.75,80.725 U3.1@81.795,80.77 ; 82.5,81.349 82.5,81.5 ; v1(83,67) 83.4,67.4 C9.1 84.705,68.105 85,68.105 85.045,68.15 U2.8 ; v1@83.3,76.5 C18.1 ; v1(86.5,77.5) 87.479,77.5 R6.1 ; U2.23 91.5,65 92.024,64.476 92.024,64.076 C10.1 92.1,63.1 v1(92,63) ; U2.35 93.15,71.15 93.524,71.524 93.87,71.524 C11.1@93.955,71.609 ; C11.1 94.6,71.6 v1@95,72 ; U1.1@103.79,59.729 104.096,59.423 U1.1@104.102,59.423 ; U1.1 U1.1@103.79,59.861 ; C4.1@106.425,57.1 C4.1 C4.1@107.02,57.62 ; R1.2 v1@109.5,60.5
  L1(Signal) w0.3: v1(77,64) 24MHz.4 ; v1(77.5,66.5) C5.1 ; v1(81,60.5) 24MHz.2 ; v1(81,70.5) 81.9,70.5 C7.1 82.05,70.65 83.95,70.65 C8.1 83.5,70.2 v1(83.5,70) ; C6.1 81.8,66 v1(82,66) ; C12.1 87,73.9 U2.47 ; v1(90,63) 90,63.9 ?.1 ; v1(90.5,58.5) 90.625,58.375 J3.6 ; v1(95,62.5) 95,63.776 R5.2 ; v1(96,80.5) 96,81.4 C14.1 ; v1(99,79.5) 99.5,79 J??.3 ; v1(107,71) 108.79,71 J1.5
  other v1: 106,58.5 107,58.5 104,59 109.502,60.618 104,61.5 104,62.5 105.5,63 103.5,63.5 95.05,72.039 83.332,76.419
  other v2: 87.05,66.7 88.15,66.7 89.25,66.7 90.35,66.7 91.45,66.7 87.05,67.8 88.15,67.8 89.25,67.8 90.35,67.8 91.45,67.8 87.05,68.9 88.15,68.9 89.25,68.9 90.35,68.9 91.45,68.9 87.05,70 88.15,70 89.25,70 90.35,70 91.45,70 87.05,71.1 88.15,71.1 89.25,71.1 90.35,71.1 91.45,71.1 79.95,77.95 81.05,77.95 79.95,79.05 81.05,79.05
"IMU REGOUT": C16.2 U3.10 | length 1.6
  L1(Signal) w0.2: C16.2 76.992,78.5 77.242,78.25 77.958,78.25
IMU_CPOUT: C18.2 U3.20 | length 1
  L1(Signal) w0.26: 83.042,77.75 83.1,77.75 83.3,77.95 C18.2
IMU_INT: U2.45 U3.12 | length 17.1
  L1(Signal) w0.26: U3.12@78.5,77.245 78.27,77.245 78.23,77.205 78.23,75.967 78,75.737 78,74.5 79,73.5 82,73.5 84,75.5 86,75.5 86.5,75 87.848,75 88,74.848 U2.45
IMU_SCL: R3.1 U2.42 U3.23 | length 18.4
  L1(Signal) w0.26: U3.23 84.25,79.25 85,80 85,80.848 85.152,81 v1(86,81) ; U2.42 89.5,73 90,73.5 90,78.65 90.6,79.25 R3.1 90.6,80.848 90.448,81 v1(89.5,81)
  L4(Signal) w0.26: v1(86,81) v1(89.5,81)
IMU_SDA: R4.1 U2.43 U3.24 | length 17.9
  L1(Signal) w0.26: U3.24 83.25,79.75 83.5,80 83.5,81.848 83.652,82 88.348,82 88.58,81.768 88.58,79.82 R4.1 88.9,77.1 89,77 U2.43
LED_PWR_K: D1.2 R1.1 | length 1.5
  L1(Signal) w0.26: D1.2 R1.1
MCU_BOOT0: R6.2 U2.44 | length 4.7
  L1(Signal) w0.26: R6.2@87.5,76.623 87.5,76.6 88.5,75.6 U2.44
MCU_LED_A: D2.1 U2.26 | length 3.4
  L1(Signal) w0.26: U2.26 94.321,66.65 94.472,66.5 D2.1
MCU_NRST: C14.2 J??.1 R7.1 U2.7 | length 36.2
  L1(Signal) w0.2: v3(83.452,68.068) 84.033,68.65 U2.7
  L1(Signal) w0.26: v1(95.5,82.5) 95.584,82.416 96.171,82.416 96.77,81.817 96.77,81.63 C14.2 R7.1 100.5,78.5 100.148,78.148
  L4(Signal) w0.2: v3(83.452,68.068) 84.5,69.117 84.5,75 85,75.5 92.5,75.5 94,77 94,79 95,80 94.5,80.5 94.5,82 95,82.5 v1(95.5,82.5)
MCU_OSC_IN: 24MHz.1 C5.2 U2.5 | length 15.9
  L1(Signal) w0.2: 24MHz.1 78.9,62.3 79.4,62.8 79.4,62.983 79.517,63.1 79.624,63.1 80,63.476 80,65.4 C5.2 78.9,69.783 79.117,70 79.383,70 79.5,69.883 79.5,69.8 79.65,69.65 83.214,69.65 83.314,69.55 83.686,69.55 83.786,69.65 U2.5
MCU_PA4: J3.2 U2.14 | length 9.3
  L1(Signal) w0.3: J3.2 85.625,59.433 86,59.808 86,60.636 86.5,61.136 86.5,62.707 87,63.207 U2.14
MCU_PA5: J3.3 U2.15 | length 9.2
  L1(Signal) w0.2: J3.3 86.875,58.908 86.583,59.2 86.583,60.583 87.5,61.5 87.5,63
  L1(Signal) w0.3: 87.5,63 U2.15
MCU_PA6: J3.4 U2.16 | length 8.8
  L1(Signal) w0.2: U2.16 88,56.9 J3.4
MCU_PA7: J3.5 U2.17 | length 9.1
  L1(Signal) w0.2: U2.17 88.5,58.2 89.375,57.325 J3.5
MCU_SWCLK: J??.5 U2.37 | length 9
  L1(Signal) w0.26: U2.37 92,73.5 95.75,77.25 97.25,77.25 97.787,77.787 97.787,78
MCU_SWDIO: U2.34 | length 9.8
  L1(Signal) w0.26: U2.34 94.65,70.65 99.555,75.555 99.58,75.555 100.15,76.124
MCU_SWDO: J??.4 | length 0.3
  L1(Signal) w0.26: J??.4 J??.4@99.687,76.313
MCU_SWO: U2.39 | length 11.7
  L1(Signal) w0.26: U2.39 91,73.5 96.5,79 98,79 98.854,78.146 98.854,78.1
MCU_VCAP1: ?.2 U2.22 | length 1.5
  L1(Signal) w0.26: ?.2 90.995,64.095 90.995,65.495 U2.22
NetD2_2: D2.2 R5.1 | length 2.8
  L1(Signal) w0.26: D2.2 96.991,66.398 97.776,65.613 R5.1
NetR2_2: R2.2 U2.6 | length 4.2
  L1(Signal) w0.2: R2.2 83,68.5 83.65,69.15 83.852,69.15 83.952,69.25 85.374,69.25 85.399,69.225 85.486,69.225 85.561,69.15 U2.6
USB_D_N: J1.2 U2.32 | length 16.3
  L1(Signal) w0.26: U2.32@92.845,69.672 92.912,69.605 100.756,69.605 101.268,69.093 108.747,69.093 J1.2
USB_D_P: J1.3 U2.33 | length 16.5
  L1(Signal) w0.26: U2.33 92.655,70.145 93.027,70.145 93.104,70.068 100.948,70.068 101.46,69.557 108.747,69.557 J1.3
VBUS: C1.2 FB0608.1 J1.1 | length 7.3
  L1(Signal) w0.26: C1.2 104.852,65.548 FB0608.1 106.536,67 107.741,68.205 109,68.205 109,68.255 108.905,68.35 J1.1
"XIAL IN": 24MHz.3 C6.2 R2.1 | length 4.7
  L1(Signal) w0.2: R2.1 C6.2 80.5,64.5 24MHz.3
pads on no net: J1.4 J1.6 J1.7 J1.8 J1.9 J1.10 J1.11 J3.7 J3.8 J??.0 J??.6 U2.2 U2.3 U2.4 U2.10 U2.11 U2.12 U2.13 U2.18 U2.19 U2.20 U2.21 U2.25 U2.27 U2.28 U2.29 U2.30 U2.31 U2.38 U2.40 U2.41 U2.46 U3.2 U3.3 U3.4 U3.5 U3.6 U3.7 U3.14 U3.15 U3.16 U3.17 U3.19 U3.21 U3.22
copper on no net: | length 0.7
  L1(Signal) w0.26: 81.438,81.23 81.448,81.24 81.74,81.24 81.75,81.25 82,81.5

## Polygon pours and split planes (outlines as drawn)
GND on L1(Signal) "GND" (solid, pour order 12): 105.5,56.5 107.5,56.5 107.5,59
no net on L1(Signal) "GND" (solid, pour order 15): 107.5,59 107.5,56.5 105.5,56.5
GND on L1(Signal) "GND" (solid, pour order 13): 107.5,59 106.5,60 105,60 104.5,60.5 106.5,62.5 106.5,64.5 103.5,64.5 103,64 103,63.5 102,62.5 102,60 105.5,56.5
no net on L1(Signal) "GND" (solid, pour order 14): 105,58 105,57 105.5,56.5 107.5,56.5 107.5,59
+5V on L1(Signal) "+5V" (solid, pour order 4): 104,68 104,64.5 101.5,64.5 101.5,68
GND on L2(GND) "GND" (solid, pour order 10): 74,82.5 75,83.5 75.5,83 112,83 112.5,82.5 112.5,52.5 112,52 75,52 74,53
GND on L3(GND) "GND" (solid, pour order 11): 74,82.5 75,83.5 75.5,83 112,83 112.5,82.5 112.5,52.5 112,52 75,52 74,53 74,77

## Silkscreen, mask and mechanical layers (free items; w line width, h text height)
Bottom Component Center:
  lines w0.254: 73.5,53 75,51.5 112.5,51.5 113,52 113,82 113,82.5 112,83.5 74.5,83.5 73.5,82.5 73.5,82 73.5,53